# Altium PCB protogen_v2.PcbDoc
Units mil, origin at the board's own origin, x right, y up, seen from the top; angles counter-clockwise.
Board outline 1968.5 x 1968.5 mil, 2 copper layers (Top Layer, Top, Bottom Layer, Bottom); 28 components, 16 nets, 104 pads, 6 vias.
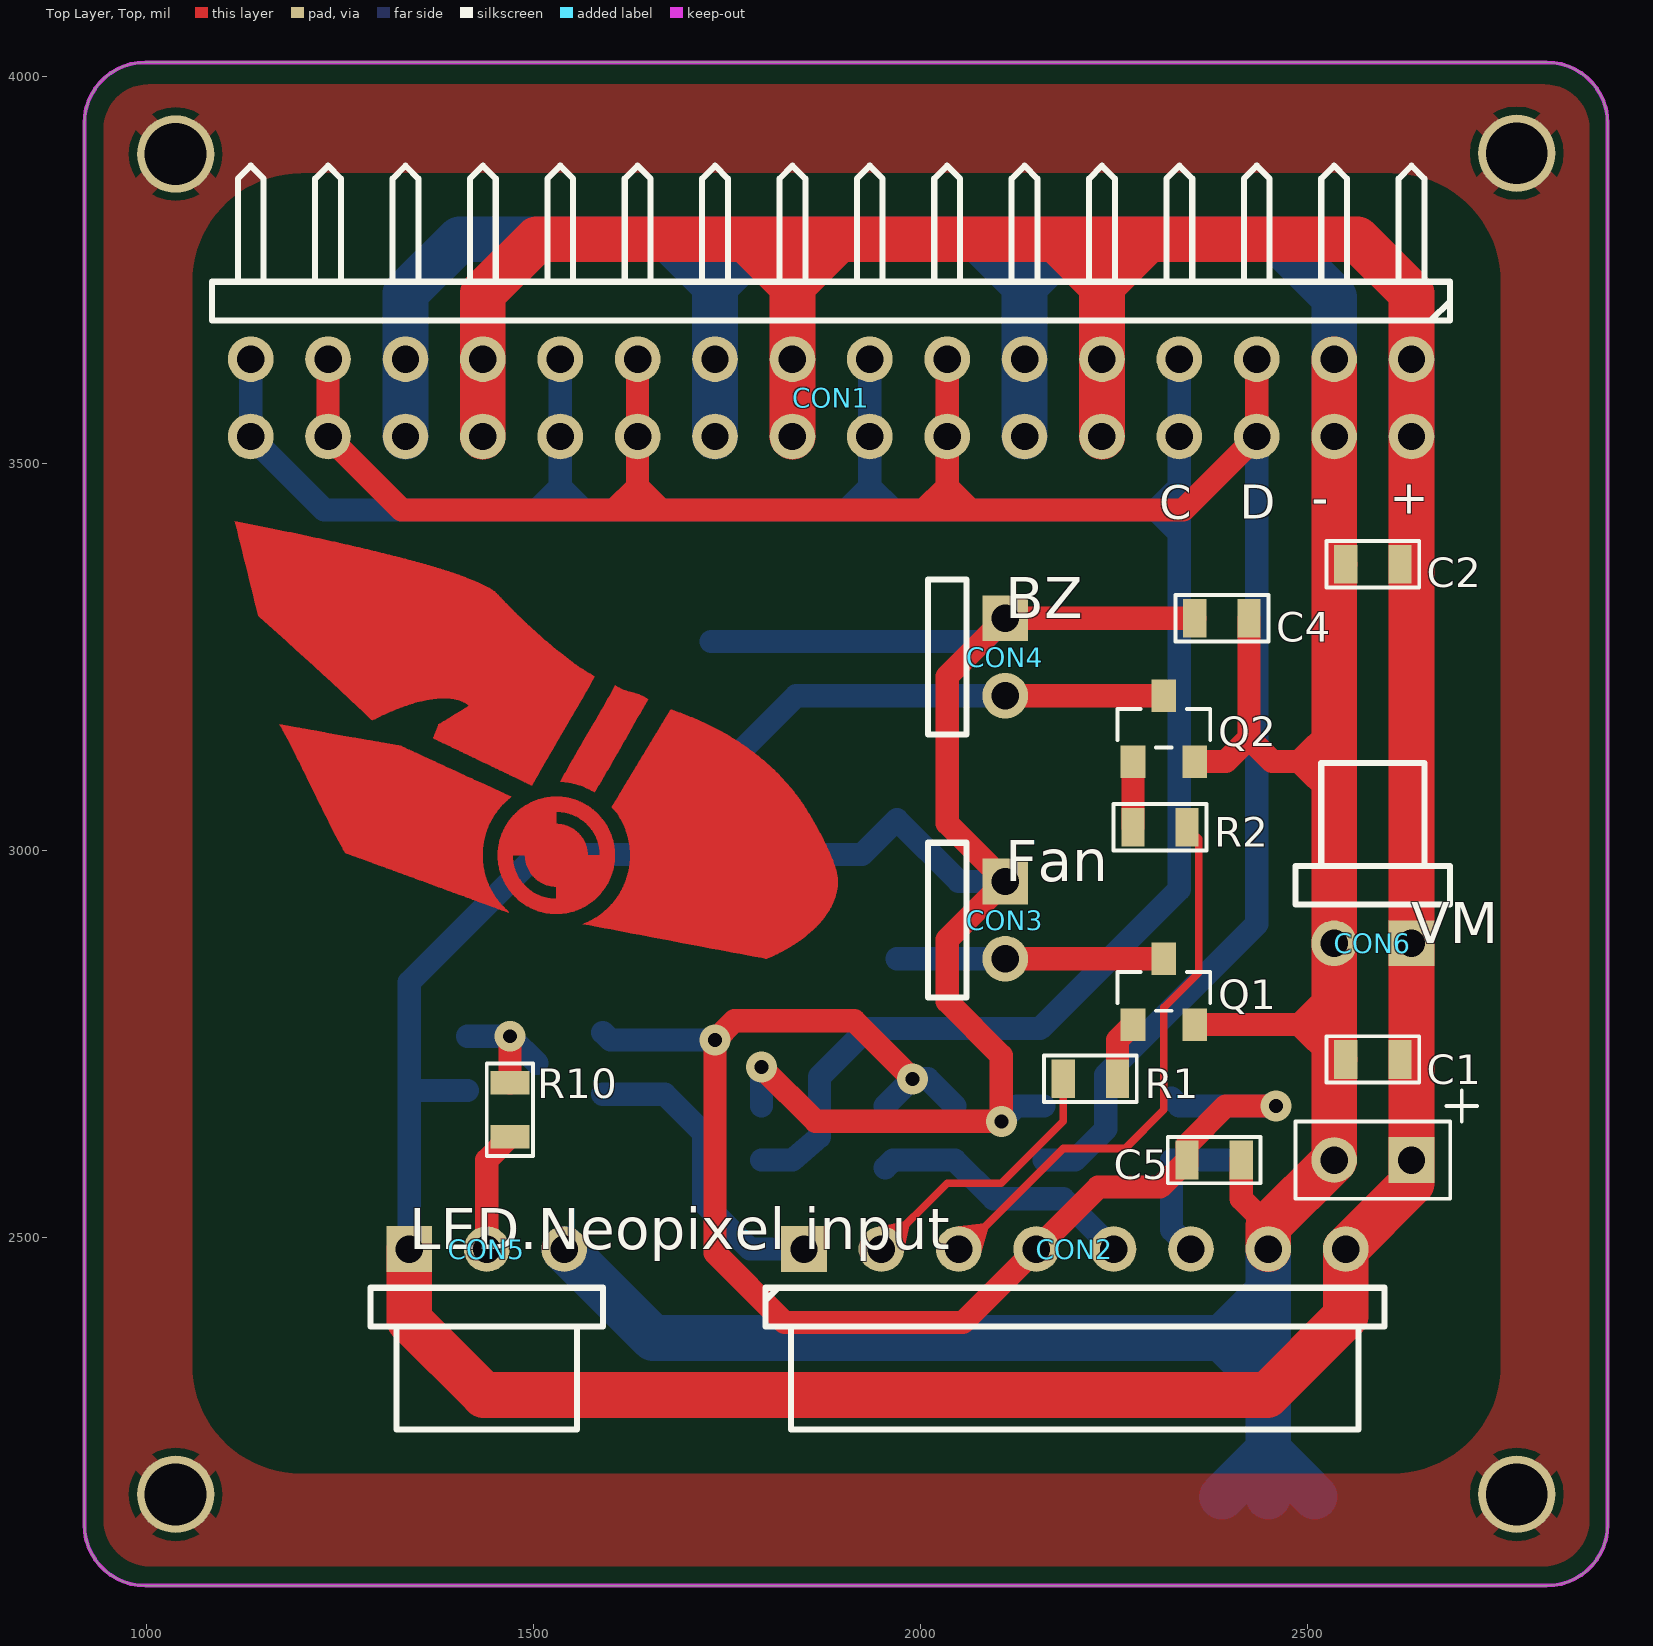
[diagram p0: Top Layer, Top view]
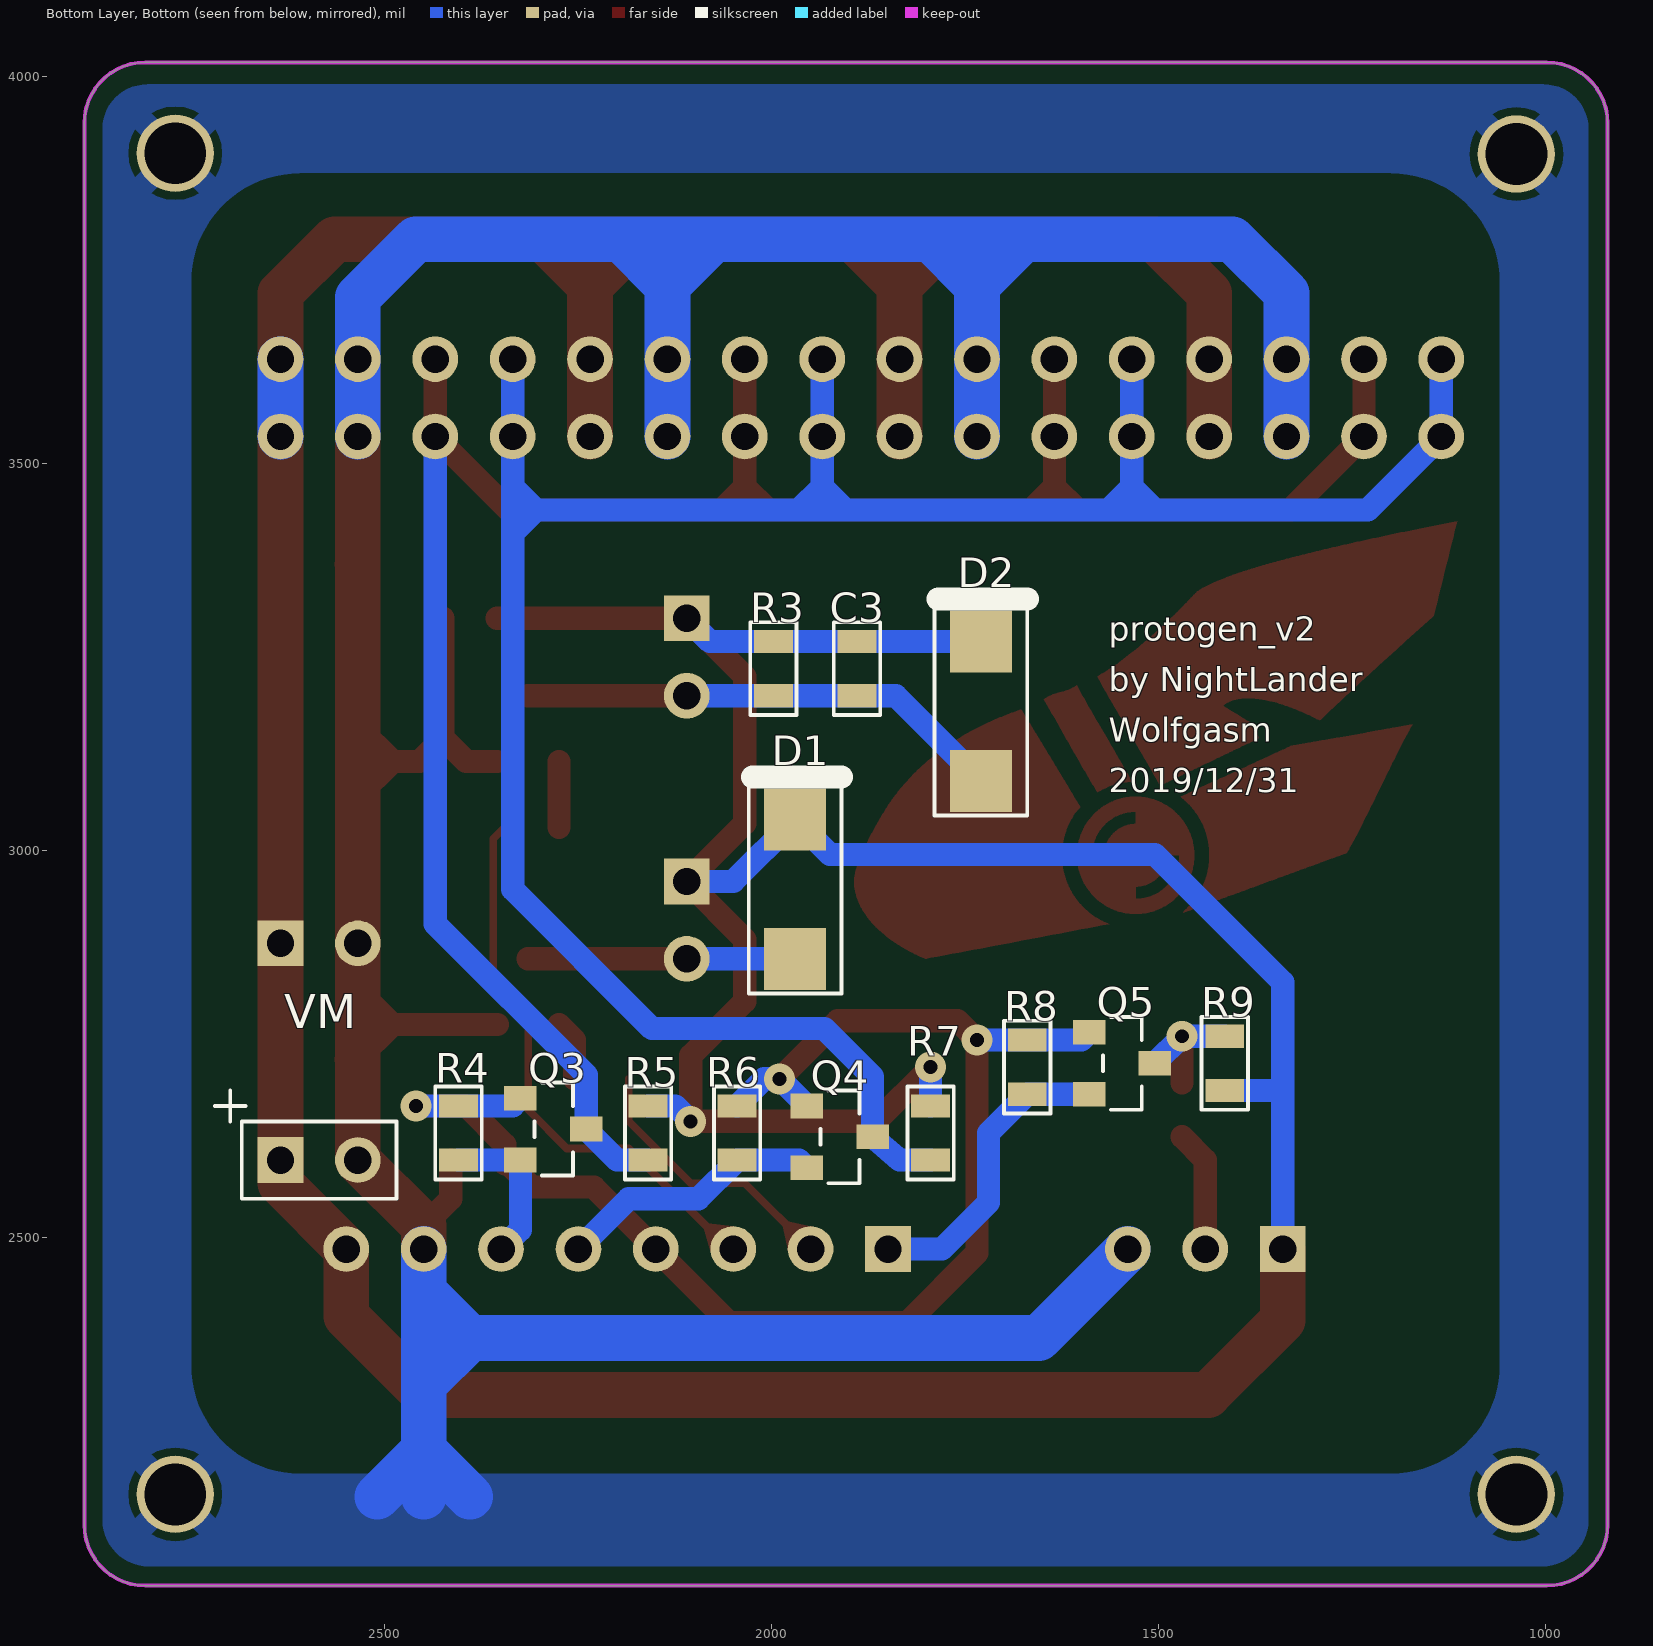
[diagram p1: Bottom Layer, Bottom view, seen from below]

## Layer stack, top to bottom
Top Solder, Top Mask: solder mask 0.4, Solder Resist, Dk 3.5
Top Layer, Top: signal copper 1.4
Dielectric 1: dielectric 12.6, FR-4, Dk 4.8
Bottom Layer, Bottom: signal copper 1.4
Bottom Solder, Bot Mask: solder mask 0.4, Solder Resist, Dk 3.5

## Board outline
998.74,4018.5 ccw(c998.74,3939.76) 920,3939.76 920,2128.74 ccw(c998.74,2128.74) 998.74,2050 2809.76,2050 ccw(c2809.76,2128.74) 2888.5,2128.74 2888.5,3939.76 ccw(c2809.76,3939.76) 2809.76,4018.5

## Design rules (kind name [scope] priority, off if disabled: settings)
Clearance [All] p1: gap=10 ignorepadtopadclearanceinfootprint=FALSE except(0: Arc-Hole Track-Hole SMDPad-Hole THPad-Hole Via-Hole Fill-Hole Poly-Hole Region-Hole Text-Hole; 12: Arc-Arc Arc-Track Arc-THPad Arc-Via Track-Track Track-THPad Track-Via THPad-THPad THPad-Via Via-Via)
PlaneClearance [All] p1: clearance=10
PolygonConnect PolygonConnect_4 [IsPolygon And InNet('GND') And OnLayer('Bottom Layer, Bottom') vs IsVia] p1: connectstyle=Direct reliefconductorwidth=15 reliefentries=4 polygonreliefangle="90 Angle" airgapwidth=10
PolygonConnect PolygonConnect_3 [IsPolygon And InNet('GND') And OnLayer('Bottom Layer, Bottom') vs IsPad] p2: connectstyle=Relief reliefconductorwidth=30 reliefentries=4 polygonreliefangle="45 Angle" airgapwidth=10
PolygonConnect PolygonConnect_2 [IsPolygon And InNet('GND') And OnLayer('Top Layer, Top') vs IsVia] p3: connectstyle=Relief reliefconductorwidth=15 reliefentries=4 polygonreliefangle="45 Angle" airgapwidth=10
PolygonConnect PolygonConnect_1 [IsPolygon And InNet('GND') And OnLayer('Top Layer, Top') vs IsPad] p4: connectstyle=Relief reliefconductorwidth=30 reliefentries=4 polygonreliefangle="45 Angle" airgapwidth=10
PolygonConnect [All] p5: connectstyle=Relief reliefconductorwidth=10 reliefentries=4 polygonreliefangle="90 Angle" airgapwidth=10
RoutingVias [All] p1: holewidth=28 width=50 viastyle="Through Hole" minholewidth=28 minwidth=50 maxholewidth=28 maxwidth=50
SolderMaskExpansion [All] p1: expansion=4
Width [All] p1: maxlimit=10 minlimit=10 preferedwidth=10
29 further rules are at their usual default settings.

## Components (designator, comment, footprint, x,y, rotation, side; value= is the part's Value field where it differs from the comment)
C1 "104p" CC0603 2620,2730 r180 top
C2 "104p" CC0603 2620,3370 r180 top
C3 "104p" CC0603 1890,3200 r90 bottom
C4 "104p" CC0603 2425,3300 r180 top
C5 "104p" CC0603 2415,2600 r180 top
CON1 "LED.matric" HDR2X16H_HEADER_16X2H(Primary) 2635,3635 r180 top
CON2 "input" HDR1X8H 1850,2485 r0 top
CON3 "Fan" HDR1X2H 2110,2960 r270 top
CON4 "BZ" HDR1X2H 2110,3300 r270 top
CON5 "LED.Neopixel" HDR1X3H 1340,2485 r0 top
CON6 "VM" HDR1X2H 2635,2880 r180 top
D1 "1N4004" D2010 1970,2860 r270 bottom
D2 "1N4004" D2010 1730,3090 r270 bottom
Q1 "BSS138" SOT-23 2275,2775 r0 top
Q2 "BSS138" SOT-23 2275,3115 r0 top
Q3 "BSS138" SOT-23 2325,2680 r270 bottom
Q4 "BSS138" SOT-23 1955,2670 r270 bottom
Q5 "BSS138" SOT-23 1590,2765 r270 bottom
R1 "1k" R0603_S-R0603(Primary) 2185,2705 r0 top
R2 "1k" R0603_S-R0603(Primary) 2345,3030 r180 top
R3 "1k" R0603_S-R0603(Primary) 1998,3200 r90 bottom
R4 "10k" R0603_S-R0603(Primary) 2405,2600 r90 bottom
R5 "10k" R0603_S-R0603(Primary) 2160,2600 r90 bottom
R6 "10k" R0603_S-R0603(Primary) 2045,2600 r90 bottom
R7 "10k" R0603_S-R0603(Primary) 1795,2600 r90 bottom
R8 "10k" R0603_S-R0603(Primary) 1670,2685 r90 bottom
R9 "10k" R0603_S-R0603(Primary) 1415,2760 r270 bottom
R10 "330" R0603_S-R0603(Primary) 1470,2630 r90 top

## Footprints (in the part's own frame and the unit in brackets; to place one, negate y for a bottom-side part, rotate by r counter-clockwise, add the part's x,y. Pads: shape width x height; smd on the part's side, far side on the other; paste and mask are expansions set on the pad)
CC0603 [mil]
  rect 30x50 smd mask-1000: 1(0,0) 2(70,0)
  silkscreen extent -25,-30 95,30
D2010 [mil]
  rect 80x80 smd mask-1000: 1(-180,0) 2(0,0)
  silkscreen extent -235,-60 45,60
HDR1X2H [mm]
  rect 1.5x1.5 hole 0.9: 1(0,0)
  round 1.5 hole 0.9: 2(2.54,0)
  silkscreen extent -1.27,-2.54 3.81,-1.27
HDR1X3H [mm]
  rect 1.5x1.5 hole 0.9: 1(0,0)
  round 1.5 hole 0.9: 2(2.54,0) 3(5.08,0)
  silkscreen extent -1.27,-5.93 6.35,-1.27
HDR1X8H [mm]
  rect 1.5x1.5 hole 0.9: 1(0,0)
  round 1.5 hole 0.9: 2(2.54,0) 3(5.08,0) 4(7.62,0) 5(10.16,0) 6(12.7,0) 7(15.24,0) 8(17.78,0)
  silkscreen extent -1.27,-5.93 19.05,-1.27
HDR2X16H_HEADER_16X2H(Primary) [mm]
  round 1.5 hole 0.9: 1(0,0) 2(0,2.54) 3(2.54,0) 4(2.54,2.54) 5(5.08,0) 6(5.08,2.54) 7(7.62,0) 8(7.62,2.54) 9(10.16,0) 10(10.16,2.54) 11(12.7,0) 12(12.7,2.54) 13(15.24,0) 14(15.24,2.54) 15(17.78,0) 16(17.78,2.54) 17(20.32,0) 18(20.32,2.54) 19(22.86,0) 20(22.86,2.54) 21(25.4,0) 22(25.4,2.54) 23(27.94,0) 24(27.94,2.54) 25(30.48,0) 26(30.48,2.54) 27(33.02,0) 28(33.02,2.54) 29(35.56,0) 30(35.56,2.54) 31(38.1,0) 32(38.1,2.54)
  silkscreen extent -1.27,-6.35 39.37,-1.27
R0603_S-R0603(Primary) [mil]
  rect 30x50 smd mask-1000: A(0,0) B(70,0)
  silkscreen extent -25,-30 95,30
SOT-23 [mil]
  rect 32x42 smd: 1(0,0) 2(40,85) 3(80,0)
  silkscreen extent -20,18 100,68

## Free pads (board coordinates)
  round 100 hole 80: 0(1038,2168) 0(1038,3900) 0(2771,2168) 0(2771,3901)
  round 59.06 hole 35.43: 0(2535,2600)
  rect 59.06x59.06 hole 35.43: 0(2635,2600)

## Via types
v1: diameter 40, hole 18, Top Layer, Top to Bottom Layer, Bottom, 6 vias

## Nets (pads, with @x,y where several pads share a name; then routed paths per layer and width w, separated by ;. In a path a pad name is that pad's centre, name@x,y a point inside that pad or via, vN(x,y) a via of type N, cw(c..) or ccw(c..) an arc to the next point about the centre after c; other vN are vias at no path point)
3.3V: C5.2 CON2.4 Q3.1 Q4.1 Q5.1 R4.B R6.B R8.B | length 1873.7
  Top Layer, Top w30: v1(1990,2705) 1915,2780 1760,2780 v1(1735,2755) 1735,2480 1825,2390 2055,2390 CON2.4 2230,2565 2310,2565 C5.2 ; C5.2@2345,2595 C5.2 ; v1(2460,2670) 2395,2670 2345,2620 C5.2
  Bottom Layer, Bottom w30: Q5.1 1600,2755 R8.B v1(1735,2755) ; Q4.1 v1(1990,2705) 2010,2705 R6.B ; Q3.1 2335,2670 R4.B v1(2460,2670)
BZ: CON2.3 R2.A | length 945
  Top Layer, Top w10: R2.A 2360,3015 2360,2842 2315,2797 2315,2665 2265,2615 2185,2615 2055,2485 CON2.3 ; CON2.3 2050,2496.84 2053.53,2500.37 2083.72,2513.72 ; CON2.3 2064.7,2485 2065.73,2486.04 2083.72,2513.72 ; CON2.3 2050,2508.56 2050.97,2509.53 2083.72,2513.72 ; CON2.3 2071.43,2485 2074.37,2482.06 2083.72,2513.72
FAN: CON2.2 R1.A | length 573.4
  Top Layer, Top w10: R1.A 2185,2650 2105,2570 2035,2570 CON2.2 ; CON2.2 1950,2498.31 1952.29,2500.6 1981.32,2516.32 ; CON2.2 1963.31,2485 1965.6,2487.29 1981.32,2516.32 ; CON2.2 1950,2508.54 1949.01,2509.53 1981.32,2516.32 ; CON2.2 1973.54,2485 1974.53,2484.01 1981.32,2516.32
GND: C1.2 C2.2 C4.1 C5.1 CON1.3 CON1.4 CON1.11 CON1.12 CON1.19 CON1.20 CON1.27 CON1.28 CON2.7 CON5.3 CON6.2 pad.0@1038,2168 pad.0@1038,3900 pad.0@2535,2600 pad.0@2771,2168 pad.0@2771,3901 Q1.3 Q2.3 | length 6200.6
  Top Layer, Top w30: Q1.3 2490,2775 ; Q2.3 2395,3115 2425,3145 ; C5.1 2415,2550 2450,2515 ; C4.1 2425,3145 ; 2535,2775 2490,2775 ; 2535,2820 2490,2775 ; 2535,3070 2490,3115 ; 2535,3115 2490,3115 ; 2535,3160 2490,3115 ; C2.2@2535,3370 C2.2 ; C1.2 2535,2730 2490,2775 ; 2425,3145 2455,3115 2490,3115
  Top Layer, Top w59.06: CON2.7 2450,2515 2535,2600 2535,2730 2535,2775 2535,2820 CON6.2 2535,3070 2535,3115 2535,3160 2535,3370 CON1.4 CON1.3
  Bottom Layer, Bottom w59.06: CON1.28 CON1.27 1335,3720 1405,3790 1675,3790 ; CON5.3 1655,2370 2390,2370 ; CON1.20 CON1.19 1735,3730 ; CON1.12 CON1.11 2135,3730 ; 2390,2165 2450,2225 ; 2450,2165 2450,2225 ; CON2.7 2450,2430 ; 2510,2165 2450,2225 ; CON1.4 CON1.3 2535,3715 2460,3790 2195,3790 ; 1675,3790 1735,3730 ; 1675,3790 1735,3790 ; 1735,3730 1795,3790 ; 1735,3730 1735,3790 ; 1735,3790 1795,3790 ; 1795,3790 2075,3790 ; 2075,3790 2135,3730 ; 2075,3790 2135,3790 ; 2135,3730 2135,3790 ; 2135,3730 2195,3790 ; 2135,3790 2195,3790 ; 2390,2370 2450,2430 ; 2390,2370 2450,2310 ; 2390,2370 2450,2370 ; 2450,2225 2450,2310 ; 2450,2310 2450,2370 ; 2450,2370 2450,2430
LED.NEOPIXEL.H: CON5.2 R10.A | length 157.4
  Top Layer, Top w30: CON5.2 1440,2600 R10.A
LED.NEOPIXEL.L: CON2.1 Q5.3 R8.A | length 395.4
  Bottom Layer, Bottom w30: Q5.3 R8.A 1720,2635 1720,2545.25 1780.25,2485 CON2.1
NET00000: Q5.2 R9.A R10.B | length 164.5
  Top Layer, Top w30: R10.B v1(1470,2760)
  Bottom Layer, Bottom w30: R9.A v1(1470,2760) Q5.2
NET00007: Q1.1 R1.B | length 78.3
  Top Layer, Top w30: R1.B 2255,2755 Q1.1
NET00009: CON3.2 D1.2 Q1.2 | length 345
  Top Layer, Top w30: CON3.2 Q1.2
  Bottom Layer, Bottom w30: D1.2 CON3.2
NET00011: Q2.1 R2.B | length 85
  Top Layer, Top w30: R2.B Q2.1
NET00012: C3.1 CON4.2 D2.2 Q2.2 R3.A | length 630.6
  Top Layer, Top w30: CON4.2 Q2.2
  Bottom Layer, Bottom w30: D2.2 1840,3200 C3.1 R3.A CON4.2
SCL.H: CON1.7 CON1.8 CON1.15 CON1.16 CON1.23 CON1.24 CON1.31 CON1.32 Q4.2 R7.A | length 3398.1
  Bottom Layer, Bottom w30: CON1.31 CON1.32 1230,3440 1505,3440 ; CON1.23 CON1.24 1535,3470 ; R7.A 1835,2600 Q4.2 1870,2707.73 1932.27,2770 2155,2770 2335,2950 2335,3410 ; CON1.15 CON1.16 1935,3470 ; CON1.7 CON1.8 2335,3470 ; 1505,3440 1535,3440 ; 1505,3440 1535,3470 ; 1535,3440 1565,3440 ; 1535,3440 1535,3470 ; 1535,3470 1565,3440 ; 1565,3440 1905,3440 ; 1905,3440 1935,3440 ; 1905,3440 1935,3470 ; 1935,3440 1965,3440 ; 1935,3440 1935,3470 ; 1935,3470 1965,3440 ; 1965,3440 2305,3440 ; 2305,3440 2335,3410 ; 2305,3440 2335,3470 ; 2305,3440 2335,3440 ; 2335,3410 2335,3440 ; 2335,3440 2335,3470
SCL.L: CON2.5 Q4.3 R6.A | length 346.8
  Bottom Layer, Bottom w30: Q4.3 1965,2600 R6.A 2095,2550 2185,2550 CON2.5
SDA.H: CON1.5 CON1.6 CON1.13 CON1.14 CON1.21 CON1.22 CON1.29 CON1.30 Q3.2 R5.A | length 3110.7
  Top Layer, Top w30: CON1.29 CON1.30 1330,3440 1605,3440 ; CON1.21 CON1.22 1635,3470 ; CON1.13 CON1.14 2035,3470 ; CON1.5 CON1.6 2340,3440 2065,3440 ; 1605,3440 1635,3440 ; 1605,3440 1635,3470 ; 1635,3440 1665,3440 ; 1635,3440 1635,3470 ; 1635,3470 1665,3440 ; 1665,3440 2005,3440 ; 2005,3440 2035,3440 ; 2005,3440 2035,3470 ; 2035,3440 2065,3440 ; 2035,3440 2035,3470 ; 2035,3470 2065,3440
  Bottom Layer, Bottom w30: R5.A 2200,2600 Q3.2 2240,2710 2435,2905 CON1.6
SDA.L: CON2.6 Q3.3 R4.A | length 205.4
  Bottom Layer, Bottom w30: CON2.6 2325,2510 Q3.3 R4.A
VCC: C1.1 C2.1 C3.2 C4.2 CON1.1 CON1.2 CON1.9 CON1.10 CON1.17 CON1.18 CON1.25 CON1.26 CON2.8 CON3.1 CON4.1 CON5.1 CON6.1 D1.1 D2.1 pad.0@2635,2600 R3.B R5.B R7.B R9.B | length 8335.6
  Top Layer, Top w30: v1(1795,2720) 1865,2650 v1(2105,2650) 2105,2735 2035,2805 2035,2885 CON3.1 2035,3035 2035,3225 CON4.1 C4.2 ; C1.1 2635,2730 ; C2.1 2635,3370
  Top Layer, Top w59.06: CON5.1 1340,2392.89 1436.52,2296.37 1477.25,2296.37 2448.34,2296.37 2550,2398.02 CON2.8 2635,2570 2635,2600 2635,2730 CON6.1 2635,3370 CON1.2 CON1.1 2635,3720 2565,3790 2295,3790 ; CON1.26 CON1.25 1435,3720 1505,3790 1775,3790 ; CON1.18 CON1.17 1835,3730 ; CON1.10 CON1.9 2235,3730 ; 1775,3790 1835,3730 ; 1775,3790 1835,3790 ; 1835,3730 1835,3790 ; 1835,3730 1895,3790 ; 1835,3790 1895,3790 ; 1895,3790 2175,3790 ; 2175,3790 2235,3730 ; 2175,3790 2235,3790 ; 2235,3730 2235,3790 ; 2235,3730 2295,3790 ; 2235,3790 2295,3790
  Bottom Layer, Bottom w30: CON5.1 1340,2690 ; R9.B 1340,2690 ; D2.1 C3.2 R3.B 2080,3270 CON4.1 ; R7.B v1(1795,2720) ; v1(2105,2650) 2125,2670 R5.B ; CON3.1 2050,2960 D1.1 1925,2995 1505.38,2995 1340,2829.62 1340,2690
  Bottom Layer, Bottom w59.06: CON1.2 CON1.1

## Polygon pours and split planes (outlines as drawn)
GND on Top Layer, Top (solid, pour order 0): 945,2135 945.38,2128.28 946.5,2121.65 948.37,2115.18 950.94,2108.97 954.2,2103.08 958.09,2097.59 962.57,2092.57 967.59,2088.09 973.08,2084.2 978.97,2080.94 985.18,2078.37 991.65,2076.5 998.28,2075.38 1005,2075 2805,2075 2811.72,2075.38 2818.35,2076.5 2824.82,2078.37 2831.03,2080.94 2836.92,2084.2 2842.41,2088.09 2847.43,2092.57 2851.91,2097.59 2855.8,2103.08 2859.06,2108.97 2861.63,2115.18 2863.5,2121.65 2864.62,2128.28 2865,2135 2865,3932.5 2864.64,3938.94 2863.56,3945.29 2861.77,3951.49 2859.31,3957.45 2856.19,3963.09 2852.46,3968.35 2848.16,3973.16 2843.35,3977.46 2838.09,3981.19 2832.45,3984.31 2826.49,3986.77 2820.29,3988.56 2813.94,3989.64 2807.5,3990 1002.5,3990 996.06,3989.64 989.71,3988.56 983.51,3986.77 977.55,3984.31 971.91,3981.19 966.65,3977.46 961.84,3973.16 957.54,3968.35 953.81,3963.09 950.69,3957.45 948.23,3951.49 946.44,3945.29 945.36,3938.94 945,3932.5
GND on Bottom Layer, Bottom (solid, pour order 2): 945,2135 945.38,2128.28 946.5,2121.65 948.37,2115.18 950.94,2108.97 954.2,2103.08 958.09,2097.59 962.57,2092.57 967.59,2088.09 973.08,2084.2 978.97,2080.94 985.18,2078.37 991.65,2076.5 998.28,2075.38 1005,2075 2805,2075 2811.72,2075.38 2818.35,2076.5 2824.82,2078.37 2831.03,2080.94 2836.92,2084.2 2842.41,2088.09 2847.43,2092.57 2851.91,2097.59 2855.8,2103.08 2859.06,2108.97 2861.63,2115.18 2863.5,2121.65 2864.62,2128.28 2865,2135 2865,3932.5 2864.64,3938.94 2863.56,3945.29 2861.77,3951.49 2859.31,3957.45 2856.19,3963.09 2852.46,3968.35 2848.16,3973.16 2843.35,3977.46 2838.09,3981.19 2832.45,3984.31 2826.49,3986.77 2820.29,3988.56 2813.94,3989.64 2807.5,3990 1002.5,3990 996.06,3989.64 989.71,3988.56 983.51,3986.77 977.55,3984.31 971.91,3981.19 966.65,3977.46 961.84,3973.16 957.54,3968.35 953.81,3963.09 950.69,3957.45 948.23,3951.49 946.44,3945.29 945.36,3938.94 945,3932.5

## Keep-outs
Keep-Out Layer, Board:
  lines w5: 920,2128.74 ccw(c998.74,2128.74) 998.74,2050 ; 920,2128.74 ccw(c998.74,2128.74) 998.74,2050 ; 920,2128.74 920,3939.76 ; 920,2128.74 920,3939.76 ; 920,3939.76 cw(c998.74,3939.76) 998.74,4018.5 ; 920,3939.76 cw(c998.74,3939.76) 998.74,4018.5 ; 998.74,2050 2809.76,2050 ; 998.74,2050 2809.76,2050 ; 998.74,4018.5 2809.76,4018.5 ; 998.74,4018.5 2809.76,4018.5 ; 2809.76,2050 ccw(c2809.76,2128.74) 2888.5,2128.74 ; 2809.76,2050 ccw(c2809.76,2128.74) 2888.5,2128.74 ; 2809.76,4018.5 cw(c2809.76,3939.76) 2888.5,3939.76 ; 2809.76,4018.5 cw(c2809.76,3939.76) 2888.5,3939.76 ; 2888.5,2128.74 2888.5,3939.76 ; 2888.5,2128.74 2888.5,3939.76

## Other copper
Top Layer, Top:
  pour cut-out: 2750,3735 2749.61,3745.46 2748.44,3755.87 2746.49,3766.15 2743.78,3776.27 2740.32,3786.15 2736.14,3795.74 2731.24,3805 2725.67,3813.86 2719.46,3822.29 2712.63,3830.22 2705.22,3837.63 2697.29,3844.46 2688.86,3850.67 2680,3856.24 2670.74,3861.14 2661.15,3865.32 2651.27,3868.78 2641.15,3871.49 2630.87,3873.44 2620.46,3874.61 2610,3875 1200,3875 1189.54,3874.61 1179.13,3873.44 1168.85,3871.49 1158.73,3868.78 1148.85,3865.32 1139.26,3861.14 1130,3856.24 1121.13,3850.67 1112.71,3844.46 1104.78,3837.63 1097.37,3830.22 1090.54,3822.29 1084.33,3813.86 1078.76,3805 1073.86,3795.74 1069.68,3786.15 1066.22,3776.27 1063.51,3766.15 1061.56,3755.87 1060.39,3745.46 1060,3735 1060,2335 1060.39,2324.54 1061.56,2314.13 1063.51,2303.85 1066.22,2293.73 1069.68,2283.85 1073.86,2274.26 1078.76,2265 1084.33,2256.14 1090.54,2247.71 1097.37,2239.78 1104.78,2232.37 1112.71,2225.54 1121.13,2219.33 1130,2213.76 1139.26,2208.86 1148.85,2204.68 1158.73,2201.22 1168.85,2198.51 1179.13,2196.56 1189.54,2195.39 1200,2195 2610,2195 2620.46,2195.39 2630.87,2196.56 2641.15,2198.51 2651.27,2201.22 2661.15,2204.68 2670.74,2208.86 2680,2213.76 2688.86,2219.33 2697.29,2225.54 2705.22,2232.37 2712.63,2239.78 2719.46,2247.71 2725.67,2256.14 2731.24,2265 2736.14,2274.26 2740.32,2283.85 2743.78,2293.73 2746.49,2303.85 2748.44,2314.13 2749.61,2324.54 2750,2335
  region: 522 vertices and 0 holes, not listed, extent 1172.15,2919.78 1471.77,3162.97
  region: 556 vertices and 0 holes, not listed, extent 1114.63,3084.02 1579.14,3425.68
  region: 530 vertices and 0 holes, not listed, extent 1564.09,2860.09 1893.78,3182.17
  region: 440 vertices and 0 holes, not listed, extent 1454.1,2918.14 1529.93,3069.48
  region: 437 vertices and 0 holes, not listed, extent 1529.93,2918.14 1605.73,3069.48
  region: 159 vertices and 0 holes, not listed, extent 1534.93,3075.09 1648.41,3213.38
Bottom Layer, Bottom:
  pour cut-out: 1060,2335 1060.39,2324.54 1061.56,2314.13 1063.51,2303.85 1066.22,2293.73 1069.68,2283.85 1073.86,2274.26 1078.76,2265 1084.33,2256.14 1090.54,2247.71 1097.37,2239.78 1104.78,2232.37 1112.71,2225.54 1121.13,2219.33 1130,2213.76 1139.26,2208.86 1148.85,2204.68 1158.73,2201.22 1168.85,2198.51 1179.13,2196.56 1189.54,2195.39 1200,2195 2610,2195 2620.46,2195.39 2630.87,2196.56 2641.15,2198.51 2651.27,2201.22 2661.15,2204.68 2670.74,2208.86 2680,2213.76 2688.86,2219.33 2697.29,2225.54 2705.22,2232.37 2712.63,2239.78 2719.46,2247.71 2725.67,2256.14 2731.24,2265 2736.14,2274.26 2740.32,2283.85 2743.78,2293.73 2746.49,2303.85 2748.44,2314.13 2749.61,2324.54 2750,2335 2750,3735 2749.61,3745.46 2748.44,3755.87 2746.49,3766.15 2743.78,3776.27 2740.32,3786.15 2736.14,3795.74 2731.24,3805 2725.67,3813.86 2719.46,3822.29 2712.63,3830.22 2705.22,3837.63 2697.29,3844.46 2688.86,3850.67 2680,3856.24 2670.74,3861.14 2661.15,3865.32 2651.27,3868.78 2641.15,3871.49 2630.87,3873.44 2620.46,3874.61 2610,3875 1200,3875 1189.54,3874.61 1179.13,3873.44 1168.85,3871.49 1158.73,3868.78 1148.85,3865.32 1139.26,3861.14 1130,3856.24 1121.13,3850.67 1112.71,3844.46 1104.78,3837.63 1097.37,3830.22 1090.54,3822.29 1084.33,3813.86 1078.76,3805 1073.86,3795.74 1069.68,3786.15 1066.22,3776.27 1063.51,3766.15 1061.56,3755.87 1060.39,3745.46 1060,3735

## Silkscreen, mask and mechanical layers (free items; w line width, h text height)
Top Overlay, Top Silk:
  lines w5: 2680,2670 2720,2670 ; 2700,2650 2700,2690 ; 2485,2550 2685,2550 2685,2650 2485,2650 2485,2550
  text "+" at 2607,3435 h43.75
  text "-" at 2506,3434 h43.75
  text "D" at 2413,3429 h43.75
  text "C" at 2309,3428 h43.75
Bottom Overlay, Bot Silk:
  lines w5: 2680,2670 2720,2670 ; 2700,2650 2700,2690 ; 2485,2550 2685,2550 2685,2650 2485,2650 2485,2550
  text "protogen_v2" at 1565,3270.94 h31.25
  text "by NightLander" at 1565,3205.62 h31.25
  text "Wolfgasm" at 1565,3140.31 h31.25
  text "2019/12/31" at 1565,3075 h31.25
  text "VM" at 2630,2770 h43.75
Top Solder, Top Mask:
  drawing of 10 lines, arcs and shapes, not listed
  text "Wolfgasm & NightLander forever" at 1121.67,3868.62 h100
  text "Wolfgasm & NightLander forever" at 2750.62,3812.33 h100 r270
  text "Wolfgasm & NightLander forever" at 1063.38,2247.67 h100 r90
  text "Wolfgasm & NightLander forever" at 2687.33,2197.38 h100 r180
Bottom Solder, Bot Mask:
  region: 1160,3961 1167,3950 1174,3961 1186,3965 1197,3960 1202,3945 1194,3923 1167,3899 1140,3923 1132,3945 1137,3960 1148,3965
  region: 2842,3774 2831,3767 2842,3760 2846,3748 2841,3737 2826,3732 2804,3740 2780,3767 2804,3794 2826,3802 2841,3797 2846,3786
  region: 2646,2107 2639,2118 2632,2107 2620,2103 2609,2108 2604,2123 2612,2145 2639,2169 2666,2145 2674,2123 2669,2108 2658,2103
  region: 972,2287 983,2294 972,2301 968,2313 973,2324 988,2329 1010,2321 1034,2294 1010,2267 988,2259 973,2264 968,2275
  text "Wolfgasm & NightLander forever" at 2689.33,3869.62 h100
  text "Wolfgasm & NightLander forever" at 1063.38,3816.33 h100 r90
  text "Wolfgasm & NightLander forever" at 2750.62,2244.67 h100 r270
  text "Wolfgasm & NightLander forever" at 1116.67,2198.38 h100 r180